# EAGLE board Main Board (EAGLE 8.4.0)

Size 79.68 x 39.36 mm. Coordinates in mm from the lower left corner, seen from the top.
Outline: 0,0 79.68,0 79.68,39.36 0,39.36 0,0
Outline: circle at 74.93,3.81 radius 1.8
Outline: circle at 74.93,35.56 radius 1.8
Copper layers (1*16): Top 0.035mm / dielectric 1.5mm / Bottom 0.035mm
Design rules "default": minimum track width 6mil, minimum drill 0.35mm, track to track 6mil, track to pad 6mil, pad to pad 6mil, via to via 6mil, smd to smd 6mil, copper to edge 40mil, drill to drill 6mil, minimum pad ring 10mil, minimum via ring 8mil, stop-mask expansion 4mil, vias tented up to drill 0mil, thermal gap 10mil

## Footprints (pad centres in the part's own frame; a part is rotated, then mirrored left to right if it is on the bottom)
1X03_LONGPADS = drill 1.118 pad 1.88 long: 1 0,0; 2 2.54,0; 3 5.08,0
1X04_LONGPADS = drill 1.118 pad 1.88 long: 1 0,0; 2 2.54,0; 3 5.08,0; 4 7.62,0
PHOTON = drill 1.016 pad 1.88: 1 1.27,32.258; 2 1.27,29.718; 3 1.27,27.178; 4 1.27,24.638; 5 1.27,22.098; 6 1.27,19.558; 7 1.27,17.018; 8 1.27,14.478; 9 1.27,11.938; 10 1.27,9.398; 11 1.27,6.858; 12 1.27,4.318; 13 19.05,4.318; 14 19.05,6.858; 15 19.05,9.398; 16 19.05,11.938; 17 19.05,14.478; 18 19.05,17.018; 19 19.05,19.558; 20 19.05,22.098; 21 19.05,24.638; 22 19.05,27.178; 23 19.05,29.718; 24 19.05,32.258

## Placement (x,y rotation side)
J1  [1X03_LONGPADS]  71.12,17.78 90 top
J2  [1X04_LONGPADS]  10.16,15.24 90 top
U$1  PHOTON_WITH_HEADERS  [PHOTON]  22.86,30.48 270 top

## Library data of the parts
J1 = SparkFun-Connectors
J2 = SparkFun-Connectors; PROD_ID: CONN-09696
U$1 = Spark

## Nets
3V3: U$1.24
+5V: J1.3 J2.1 U$1.1
GND: J1.1 J2.4 U$1.2 U$1.21
N$1: J2.3 U$1.9
N$2: J2.2 U$1.7
N$3: J1.2 U$1.14
VBAT: U$1.22

## Tracks (layer width: path | path; a pad name or v marks a point on that pad's centre or on a via)
+5V  (2 unrouted)
GND  (3 unrouted)
N$1  (1 unrouted)
N$2  (1 unrouted)
N$3  (1 unrouted)